# EAGLE board breadboarder (EAGLE 6.5.0)
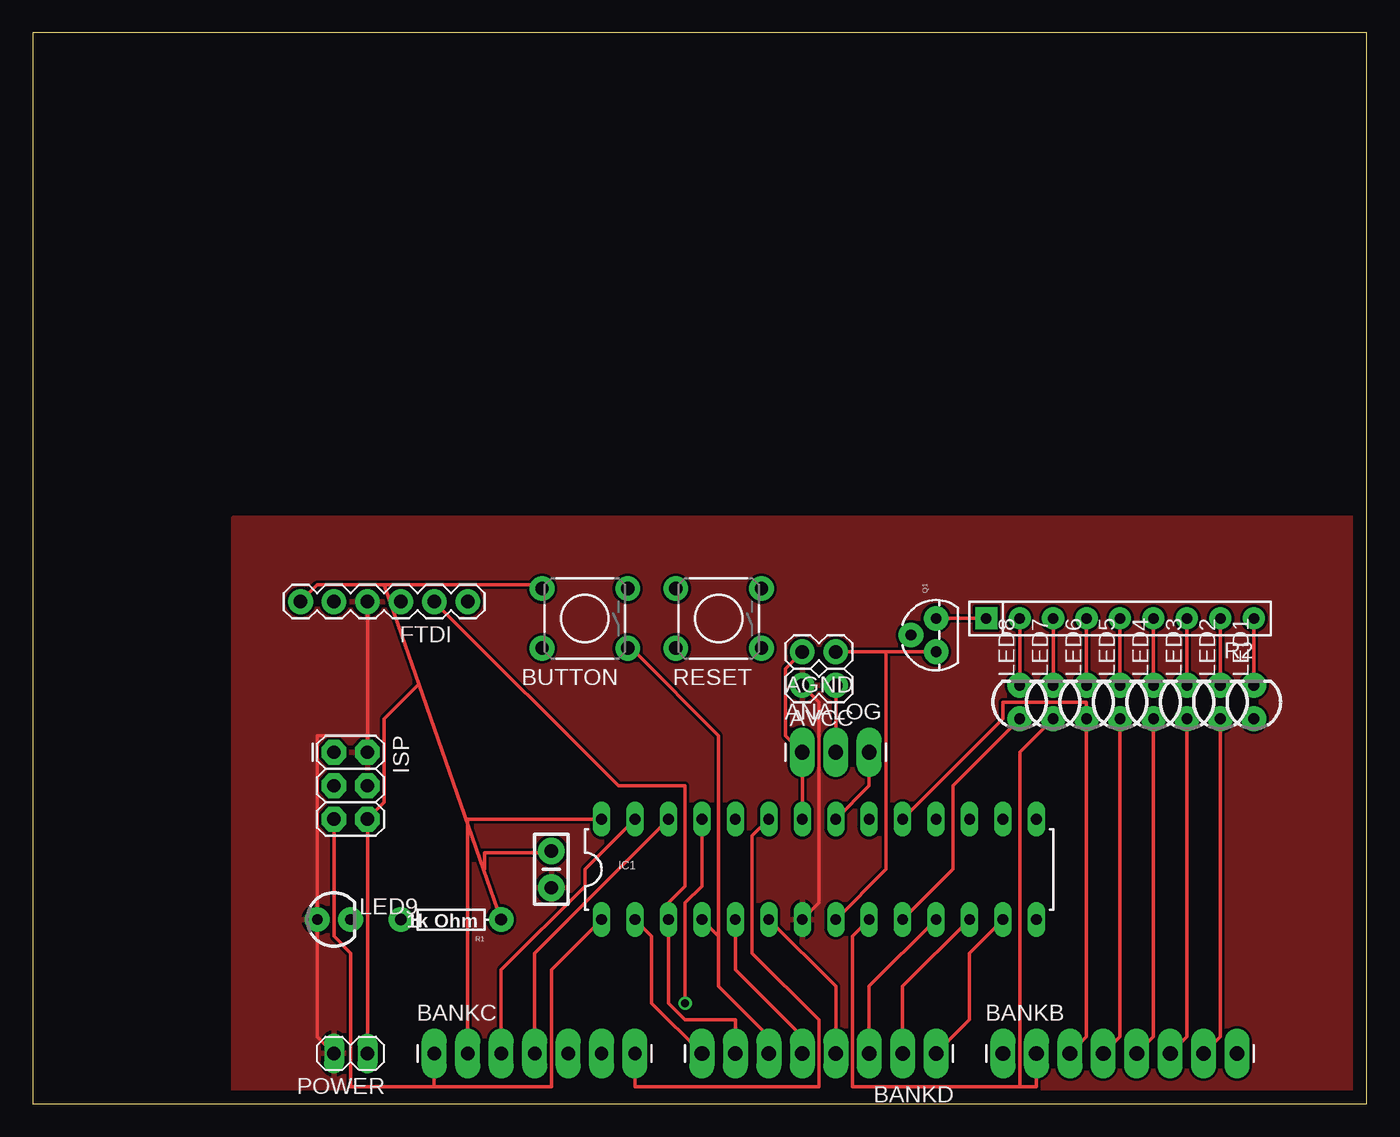
[diagram p0: board, top side]
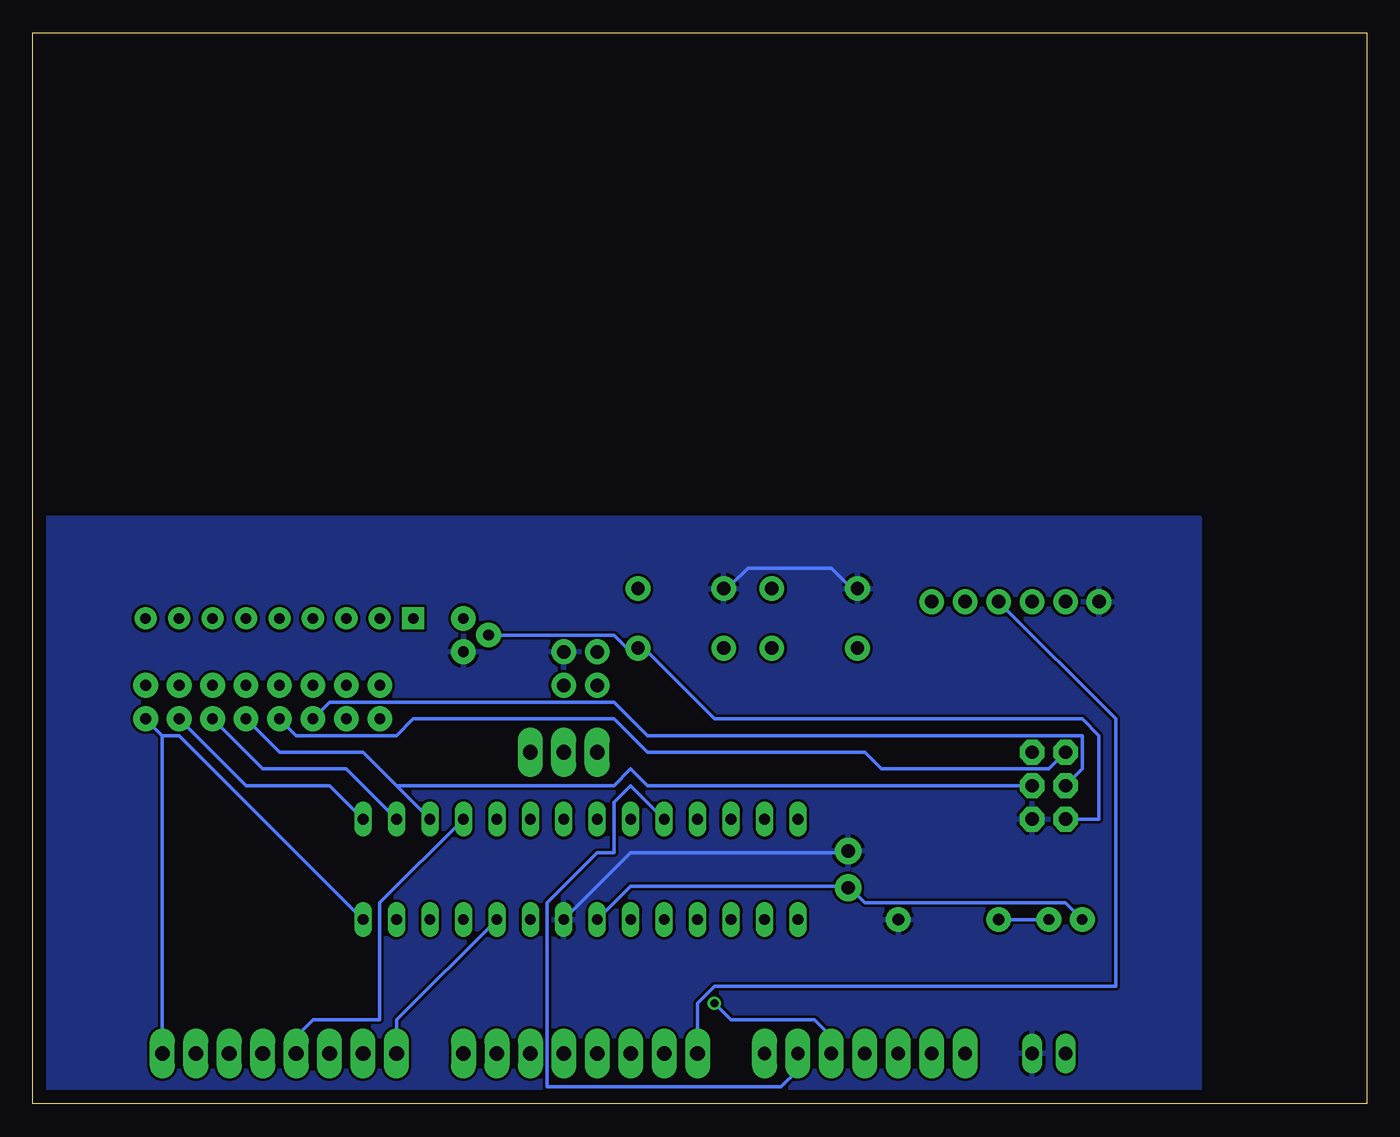
[diagram p1: board, bottom side, seen from below]

Size 101.27 x 81.27 mm. Coordinates in mm from the lower left corner, seen from the top.
Outline: 0,0 101.27,0 101.27,81.27 0,81.27 0,0
Copper layers (1*16): Top 0.035mm / dielectric 1.5mm / Bottom 0.035mm
Design rules "default": minimum track width 10mil, minimum drill 24mil, track to track 8mil, track to pad 8mil, pad to pad 8mil, via to via 8mil, smd to smd 8mil, copper to edge 40mil, drill to drill 8mil, minimum pad ring 10mil, minimum via ring 8mil, stop-mask expansion 4mil, vias tented up to drill 0mil, thermal gap 10mil

## Footprints (pad centres in the part's own frame; a part is rotated, then mirrored left to right if it is on the bottom)
1X02 = drill 1.016 pad 1.88: 1 0,0; 2 2.54,0
1X03_LONGPADS = drill 1.118 pad 1.88 long: 1 0,0; 2 2.54,0; 3 5.08,0
1X08_LONGPADS = drill 1.118 pad 1.88 long: 1 0,0; 2 2.54,0; 3 5.08,0; 4 7.62,0; 5 10.16,0; 6 12.7,0; 7 15.24,0; 8 17.78,0
1X07_LONGPADS = drill 1.016 pad 1.88 long: 1 0,0; 2 2.54,0; 3 5.08,0; 4 7.62,0; 5 10.16,0; 6 12.7,0; 7 15.24,0
TACTILE-PTH = drill 1.016 pad 1.88: 1 -3.251,2.261; 2 3.251,2.261; 3 -3.251,-2.261; 4 3.251,-2.261
CAP-PTH-SMALL-KIT = drill 1.016 pad 2.032: 1 -1.397,0; 2 1.397,0
FTDI_BASIC = drill 1.016 pad 1.88: CTS 10.16,0; DTR 0,0; GND 12.7,0; RXI 2.54,0; TXO 5.08,0; VCC 7.62,0
DIL28-3 = drill 0.813 long: 1 -16.51,-3.81; 2 -13.97,-3.81; 3 -11.43,-3.81; 4 -8.89,-3.81; 5 -6.35,-3.81; 6 -3.81,-3.81; 7 -1.27,-3.81; 8 1.27,-3.81; 9 3.81,-3.81; 10 6.35,-3.81; 11 8.89,-3.81; 12 11.43,-3.81; 13 13.97,-3.81; 14 16.51,-3.81; 15 16.51,3.81; 16 13.97,3.81; 17 11.43,3.81; 18 8.89,3.81; 19 6.35,3.81; 20 3.81,3.81; 21 1.27,3.81; 22 -1.27,3.81; 23 -3.81,3.81; 24 -6.35,3.81; 25 -8.89,3.81; 26 -11.43,3.81; 27 -13.97,3.81; 28 -16.51,3.81
2X3 = drill 1.016 pad 1.88 octagon: 1 0,0; 2 0,2.54; 3 2.54,0; 4 2.54,2.54; 5 5.08,0; 6 5.08,2.54
LED3MM = drill 0.813 pad 1.88: A -1.27,0; K 1.27,0
1X02' = drill 1.016 long: 1 -1.27,0; 2 1.27,0
TO-92 = drill 0.813 pad 1.88: 1 -1.27,0; 2 0,1.905; 3 1.27,0
AXIAL-0.3 = drill 0.9 pad 1.88: P$1 -3.81,0; P$2 3.81,0
RPACK-SIP-PTH-8-LP = drill 0.8 pad 1.676 square: P$1 0,0 | drill 0.8 pad 1.676: P$2 0,-2.54; P$3 0,-5.08; P$4 0,-7.62; P$5 0,-10.16; P$6 0,-12.7; P$7 0,-15.24; P$8 0,-17.78; P$9 0,-20.32

## Placement (x,y rotation side)
AGND  M02PTH  [1X02]  60.96,34.29 180 top
ANALOG  [1X03_LONGPADS]  58.42,26.67 0 top
AVCC  M02PTH  [1X02]  60.96,31.75 180 top
BANKB  [1X08_LONGPADS]  73.66,3.81 0 top
BANKC  [1X07_LONGPADS]  30.48,3.81 0 top
BANKD  [1X08_LONGPADS]  68.58,3.81 180 top
BUTTON  [TACTILE-PTH]  41.91,36.83 180 top
C1  0.1uF  [CAP-PTH-SMALL-KIT]  39.37,17.78 90 top
FTDI  FTDI_BASICPTH  [FTDI_BASIC]  33.02,38.1 180 top
IC1  AVR-MEGA8-PPTH  [DIL28-3]  59.69,17.78 0 top
ISP  AVR_SPI_PRG_6PTH  [2X3]  22.86,26.67 270 top
LED1  [LED3MM]  92.71,30.48 90 top
LED2  [LED3MM]  90.17,30.48 90 top
LED3  [LED3MM]  87.63,30.48 90 top
LED4  [LED3MM]  85.09,30.48 90 top
LED5  [LED3MM]  82.55,30.48 90 top
LED6  [LED3MM]  80.01,30.48 90 top
LED7  [LED3MM]  77.47,30.48 90 top
LED8  [LED3MM]  74.93,30.48 90 top
LED9  [LED3MM]  22.86,13.97 0 top
POWER  [1X02']  24.13,3.81 180 top
Q1  MOSFET-NCHANNEL2N7000  [TO-92]  68.58,35.56 90 top
R1  1k Ohm  [AXIAL-0.3]  31.75,13.97 180 top
R2  [RPACK-SIP-PTH-8-LP]  72.39,36.83 90 top
RESET  [TACTILE-PTH]  52.07,36.83 180 top

## Library data of the parts
AGND ANALOG AVCC BANKB BANKC BANKD FTDI ISP = SparkFun-Connectors
BUTTON RESET = SparkFun-Electromechanical
C1 = SparkFun-Capacitors
IC1 = SparkFun-DigitalIC
LED1-LED9 = SparkFun-LED
POWER = pinhead
Q1 = SparkFun-DiscreteSemi
R1 = SparkFun-Passives
R2 = SparkFun-Resistors

## Nets
AGND: AGND.2 ANALOG.1 IC1.22
AREF: ANALOG.3 IC1.21
AVCC: ANALOG.2 AVCC.1
GND: AGND.1 BUTTON.4 C1.2 FTDI.GND IC1.8 ISP.6 POWER.1 Q1.1 R1.P$1 RESET.4
N$1: Q1.3 R2.P$1
N$2: LED1.K R2.P$9
N$3: LED2.K R2.P$8
N$4: LED3.K R2.P$7
N$5: LED4.K R2.P$6
N$6: LED5.K R2.P$5
N$7: LED6.K R2.P$4
N$8: LED7.K R2.P$3
N$9: LED8.K R2.P$2
N$10: LED9.K R1.P$2
PB0: BANKB.8 IC1.14 LED1.A
PB1: BANKB.7 IC1.15 LED2.A
PB2: BANKB.6 IC1.16 LED3.A
PB3: BANKB.5 IC1.17 ISP.4 LED4.A
PB4: BANKB.4 IC1.18 ISP.1 LED5.A
PB5: BANKB.3 IC1.19 ISP.3 LED6.A
PB6: BANKB.2 IC1.9 LED7.A
PB7: BANKB.1 IC1.10 LED8.A
PC0: BANKC.7 IC1.23
PC1: BANKC.6 IC1.24
PC2: BANKC.5 IC1.25
PC3: BANKC.4 IC1.26
PC4: BANKC.3 IC1.27
PC5: BANKC.2 IC1.28
PD0: BANKD.8 FTDI.TXO IC1.2
PD1: BANKD.7 FTDI.RXI IC1.3
PD2: BANKD.6 BUTTON.1 IC1.4
PD3: BANKD.5 IC1.5
PD4: BANKD.4 IC1.6
PD5: BANKD.3 IC1.11
PD6: BANKD.2 IC1.12
PD7: BANKD.1 IC1.13
RESET: BANKC.1 IC1.1 ISP.5 Q1.2 RESET.1
VCC: AVCC.2 C1.1 FTDI.VCC IC1.7 ISP.2 LED9.A POWER.2

## Tracks (layer width: path | path; a pad name or v marks a point on that pad's centre or on a via)
AGND
  Top 0.254: IC1.22 ANALOG.1 57.15,27.94 57.15,33.02 AGND.2
AREF
  Top 0.254: IC1.21 63.5,24.13 ANALOG.3
AVCC
  Top 0.254: AVCC.1 ANALOG.2
GND
  Top 0.254: FTDI.GND 21.59,39.37 26.67,39.37 | R1.P$1 34.23,17.76 | 34.23,17.76 29.32,31.79 | 29.32,31.79 26.67,39.37 | Q1.1 64.77,34.29 | 64.77,34.29 AGND.1 | 64.77,34.29 64.77,17.78 IC1.8 | 26.67,39.37 38.1,39.37 BUTTON.4 | C1.2 39.37,19.05 34.29,19.05 34.29,17.78 34.23,17.76 | POWER.1 ISP.6 26.67,22.86 26.67,29.21 29.21,31.75 29.32,31.79
  Bottom 0.254: RESET.4 48.26,39.37 46.99,40.64 40.64,40.64 39.37,39.37 BUTTON.4 | IC1.8 55.88,19.05 39.37,19.05 C1.2
  pour Bottom: 13.97,44.45 12.7,44.45 12.7,-1.27 104.14,-1.27 104.14,44.45
N$1
  Top 0.254: Q1.3 R2.P$1
N$2
  Top 0.254: LED1.K R2.P$9
N$3
  Top 0.254: LED2.K R2.P$8
N$4
  Top 0.254: LED3.K R2.P$7
N$5
  Top 0.254: LED4.K R2.P$6
N$6
  Top 0.254: LED5.K R2.P$5
N$7
  Top 0.254: LED6.K R2.P$4
N$8
  Top 0.254: LED7.K R2.P$3
N$9
  Top 0.254: LED8.K R2.P$2
N$10
  Bottom 0.254: R1.P$2 LED9.K
PB0
  Bottom 0.254: IC1.14 90.17,27.94 91.44,27.94 | LED1.A 91.44,27.94 | 91.44,27.94 BANKB.8
PB1
  Top 0.254: BANKB.7 90.17,5.08 LED2.A
  Bottom 0.254: IC1.15 78.74,24.13 85.09,24.13 LED2.A
PB2
  Top 0.254: BANKB.6 87.63,5.08 LED3.A
  Bottom 0.254: IC1.16 77.47,25.4 83.82,25.4 LED3.A
PB3
  Top 0.254: BANKB.5 85.09,5.08 LED4.A
  Bottom 0.254: 73.66,24.13 76.2,26.67 82.55,26.67 LED4.A | 73.66,24.13 IC1.17 | ISP.4 54.61,24.13 55.88,25.4 57.15,24.13 73.66,24.13
PB4
  Top 0.254: BANKB.4 82.55,5.08 LED5.A
  Bottom 0.254: IC1.18 74.93,15.24 74.93,6.35 80.01,6.35 81.28,5.08 BANKB.4 | ISP.1 24.13,25.4 36.83,25.4 38.1,26.67 54.61,26.67 57.15,29.21 72.39,29.21 73.66,27.94 81.28,27.94 LED5.A
PB5
  Top 0.254: IC1.19 73.66,29.21 73.66,30.48 80.01,30.48 LED6.A 80.01,5.08 BANKB.3
  Bottom 0.254: ISP.3 21.59,25.4 21.59,27.94 54.61,27.94 57.15,30.48 78.74,30.48 LED6.A
PB6
  Top 0.254: IC1.9 62.23,12.7 62.23,1.27 74.93,1.27 | 74.93,1.27 76.2,1.27 BANKB.2 | LED7.A 74.93,26.67 74.93,1.27
PB7
  Top 0.254: LED8.A 69.85,24.13 69.85,17.78 IC1.10
  Bottom 0.254: IC1.10 73.66,6.35 BANKB.1
PC0
  Top 0.254: IC1.23 54.61,20.32 54.61,11.43 59.69,6.35 59.69,1.27 45.72,1.27 BANKC.7
PC1
  Bottom 0.254: IC1.24 55.88,24.13 57.15,22.86 57.15,19.05 58.42,19.05 62.23,15.24 62.23,1.27 44.45,1.27 43.18,2.54 BANKC.6
PC2  (via drill 0.61)
  Top 0.254: IC1.25 50.8,16.51 49.53,15.24 v49.53,7.62
  Bottom 0.254: v49.53,7.62 48.26,6.35 41.91,6.35 40.64,5.08 BANKC.5
PC3
  Top 0.254: IC1.26 38.1,11.43 BANKC.4
PC4
  Top 0.254: IC1.27 41.91,17.78 41.91,16.51 35.56,10.16 BANKC.3
PC5
  Top 0.254: IC1.28 33.02,21.59 BANKC.2
PD0
  Top 0.254: IC1.2 46.99,12.7 46.99,7.62 BANKD.8
  Bottom 0.254: FTDI.TXO 19.05,29.21 19.05,8.89 49.53,8.89 50.8,7.62 BANKD.8
PD1
  Top 0.254: BANKD.7 53.34,6.35 49.53,6.35 48.26,7.62 IC1.3 48.26,15.24 49.53,16.51 49.53,24.13 44.45,24.13 FTDI.RXI
PD2
  Top 0.254: 52.07,12.7 IC1.4 | 52.07,12.7 52.07,8.89 55.88,5.08 BANKD.6 | 52.07,12.7 52.07,27.94 45.72,34.29 BUTTON.1
PD3
  Top 0.254: IC1.5 53.34,10.16 58.42,5.08 BANKD.5
PD4
  Top 0.254: IC1.6 60.96,8.89 BANKD.4
PD5
  Top 0.254: IC1.11 63.5,8.89 BANKD.3
PD6
  Top 0.254: IC1.12 66.04,8.89 BANKD.2
PD7
  Top 0.254: IC1.13 71.12,11.43 71.12,6.35 BANKD.1
RESET
  Top 0.254: IC1.1 39.37,10.16 39.37,1.27 30.48,1.27 | BANKC.1 30.48,1.27 | 30.48,1.27 24.13,1.27 24.13,11.43 22.86,12.7 ISP.5
  Bottom 0.254: Q1.2 57.15,35.56 55.88,34.29 RESET.1 54.61,34.29 49.53,29.21 21.59,29.21 20.32,27.94 20.32,21.59 ISP.5
VCC
  Top 0.254: IC1.7 59.69,15.24 59.69,30.48 AVCC.2 | FTDI.VCC 25.4,27.94 | 25.4,27.94 ISP.2 | 25.4,27.94 21.59,27.94 LED9.A 21.59,5.08 POWER.2
  Bottom 0.254: 39.37,16.51 38.1,15.24 22.86,15.24 LED9.A | IC1.7 55.88,16.51 39.37,16.51 | 39.37,16.51 C1.1
  pour Top: 15.24,44.45 15.24,0 100.33,0 101.6,0 101.6,44.45